# Allegro board DISPLAY.brd
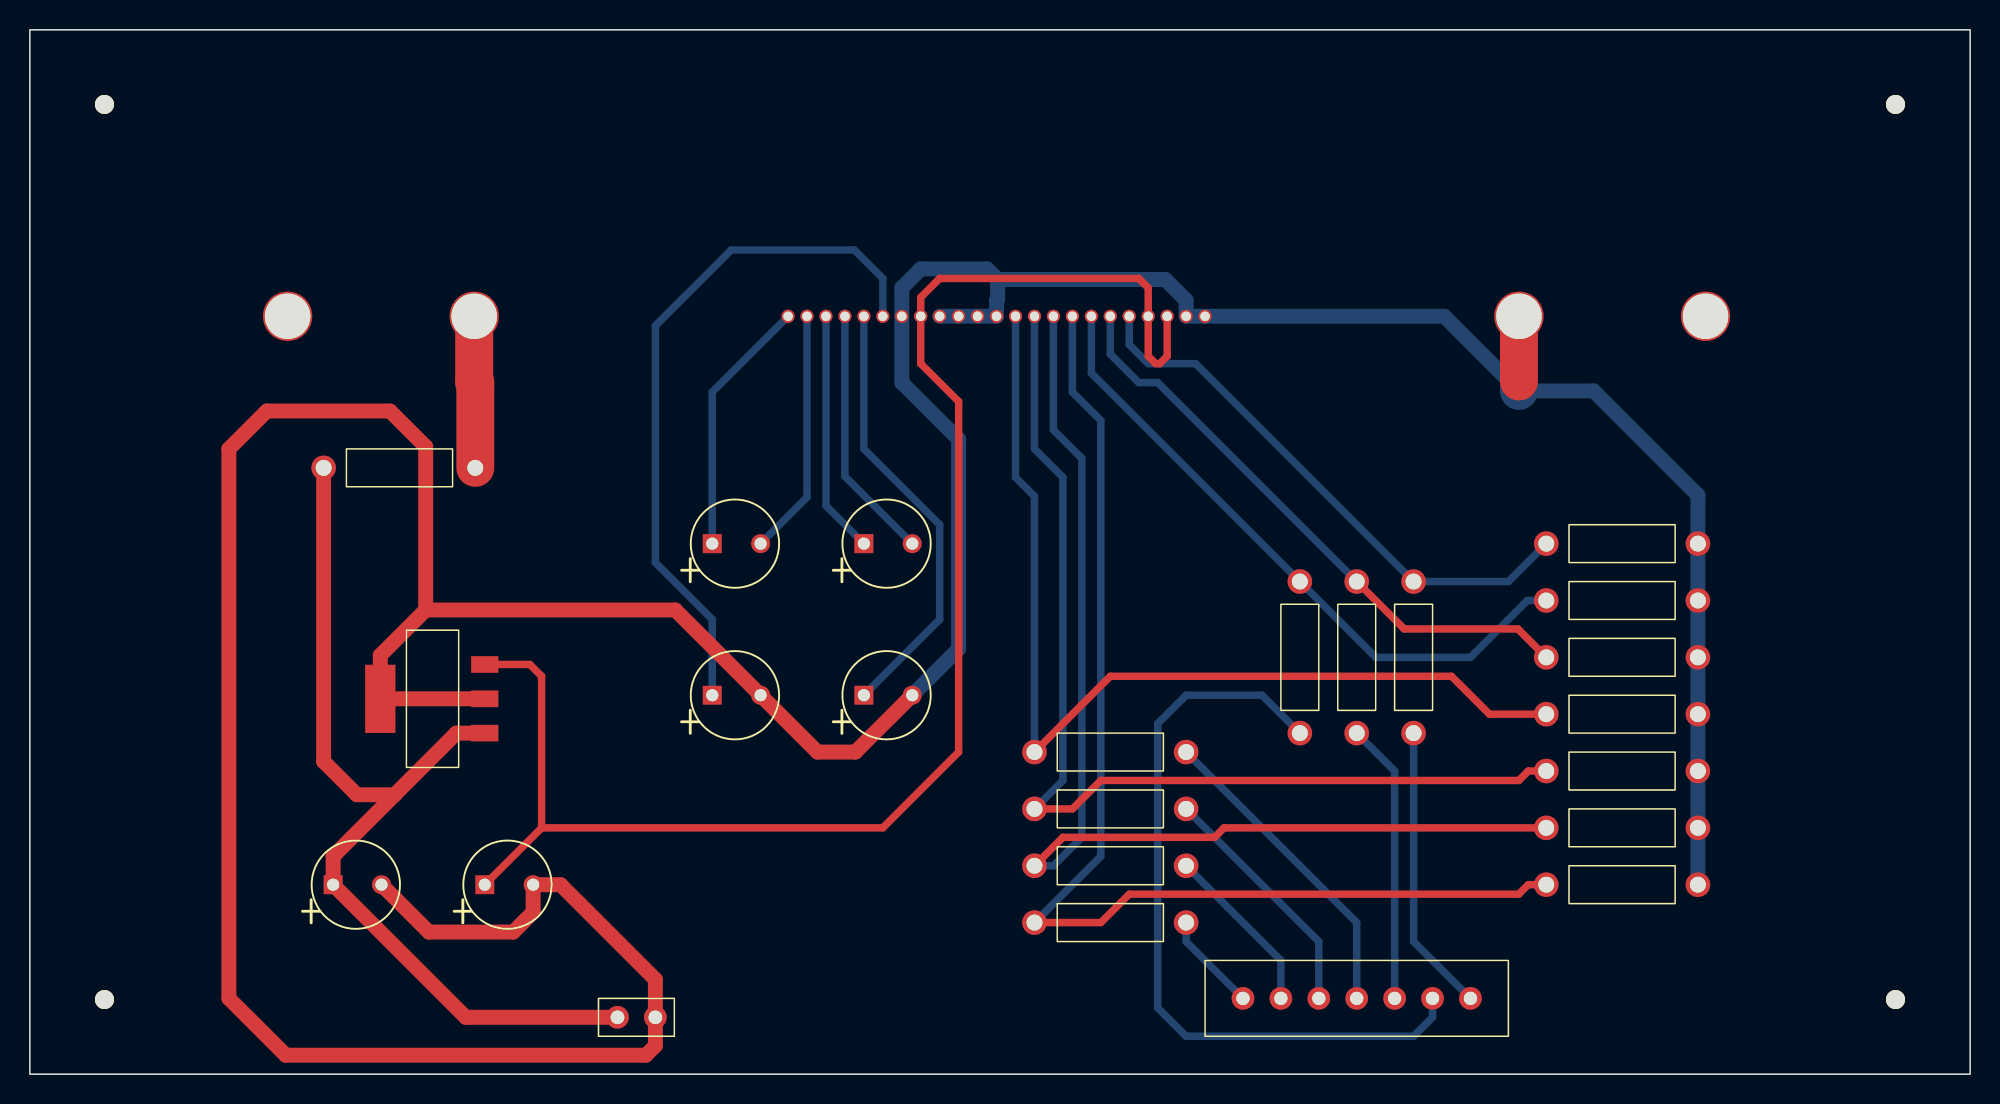
[diagram p0: board, top side]
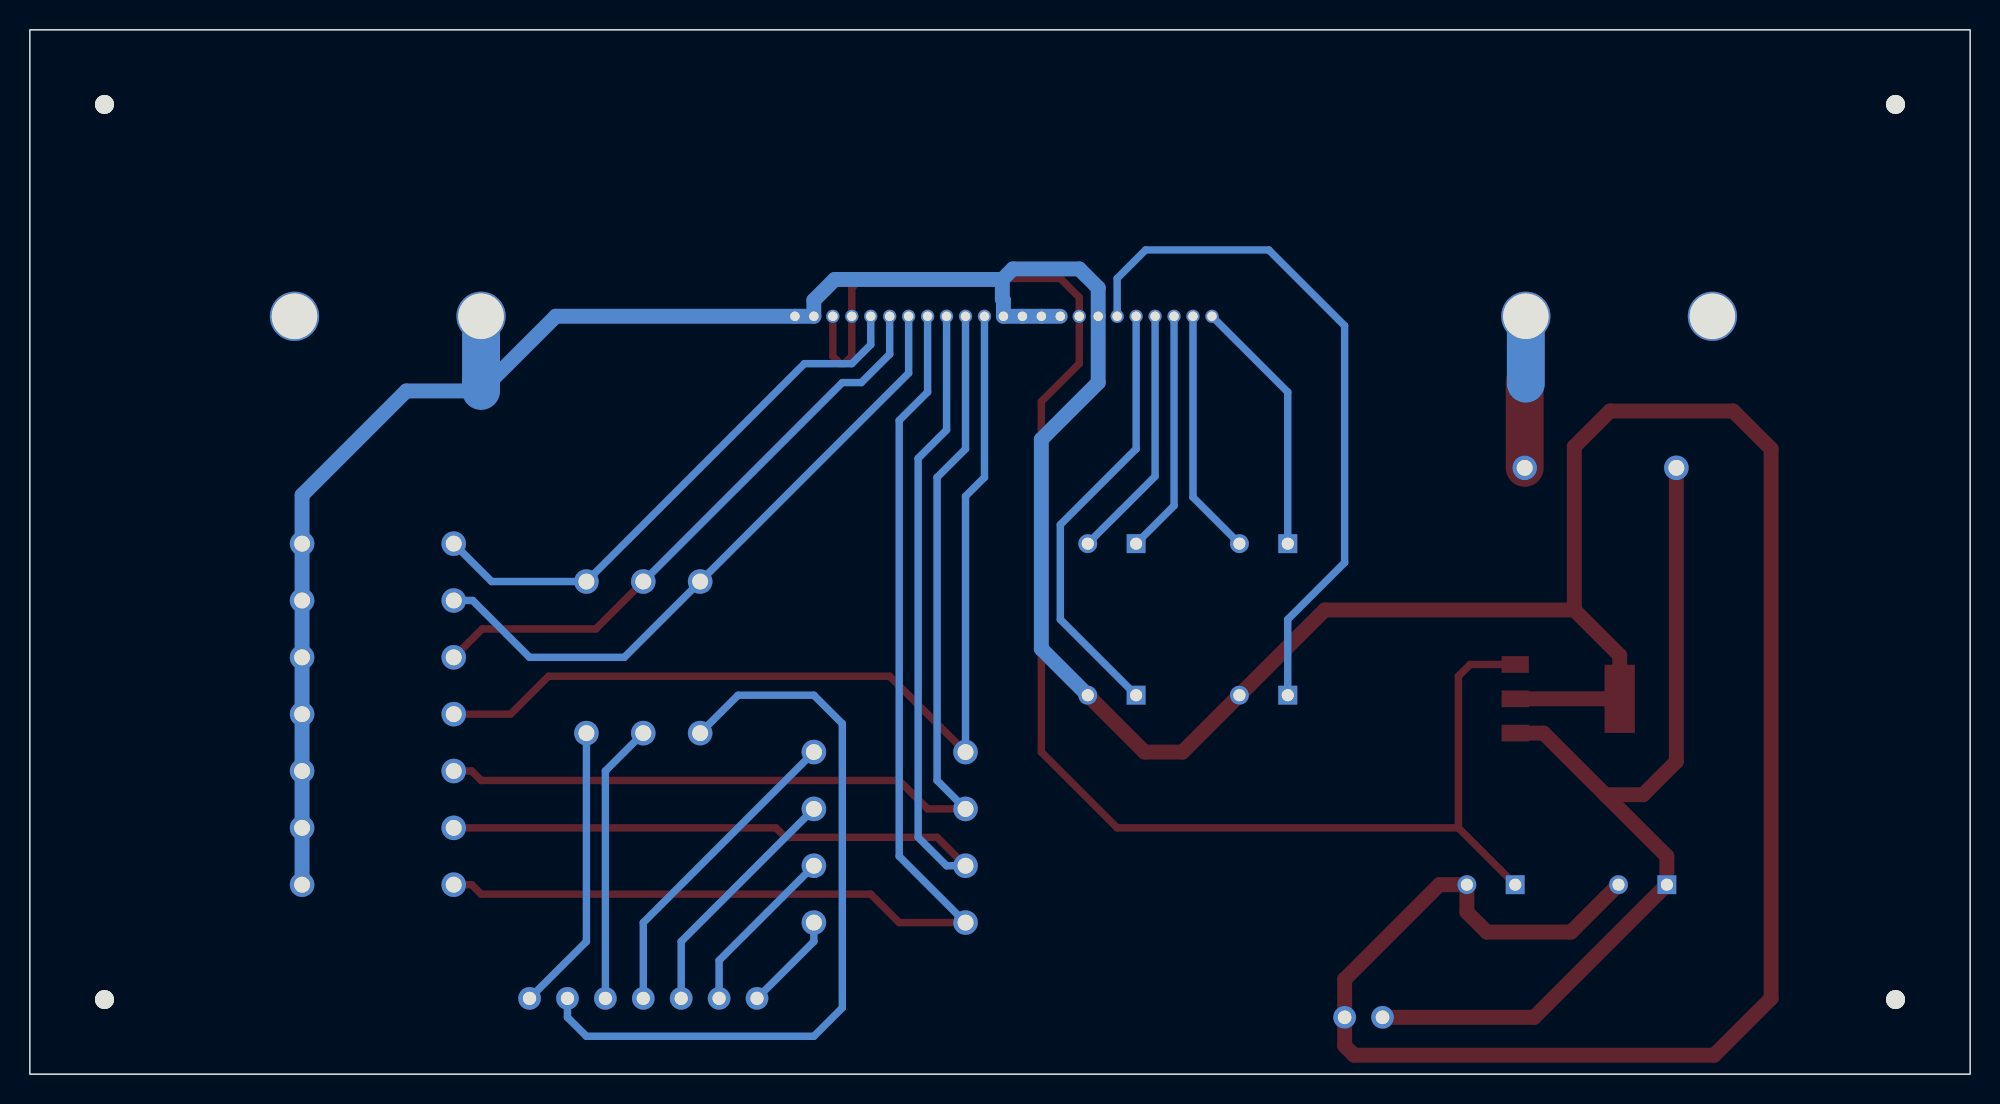
[diagram p1: board, bottom side, seen from below]

Outline 130 x 70 mm; copper layers: TOP, BOTTOM. Coordinates in mm from the lower left corner of the outline.
Outline path: rectangle 0,0 130,70

## Design rules (mm)
nets with their own width: min track width 1; nets GND VCC

## Placement (name value [footprint] x y rotation side)
C1  4.7uF/6.3V  [CAP_POL]  45.72 35.56 0 top
C2  4.7uF/6.3V  [CAP_POL]  55.88 35.56 0 top
C3  0.1uF/25V  [CAP_POL]  45.72 25.4 0 top
C4  0.1uF/25V  [CAP_POL]  55.88 25.4 0 top
C5  0.47uF  [CAP_POL]  20.32 12.7 0 top
C6  0.33uF  [CAP_POL]  30.48 12.7 0 top
J1  CON_POWER  [JUMPER2]  41.91 3.81 180 top
J2  CON_DATIN  [JUMPER7]  81.28 5.08 0 top
NOREF  -  [unnamed]  5 65 0 top
NOREF#2  -  [#2]  0 0 90 top
NOREF#3  -  [#2]  125 65 0 top
NOREF#4  -  [#2]  0 0 90 top
NOREF#5  -  [unnamed]  125 5 0 top
NOREF#6  -  [unnamed]  125 65 0 top
NOREF#7  -  [#2]  5 65 90 top
NOREF#8  -  [#2]  0 70 0 top
NOREF#9  -  [#2]  0 70 0 top
NOREF#10  -  [unnamed]  5 5 0 top
R1  R  [RES400]  19.68 40.64 270 top
R2  10k  [RES400]  67.31 10.16 270 top
R3  10k  [RES400]  67.31 17.78 270 top
R4  10k  [RES400]  67.31 21.59 270 top
R5  10k  [RES400]  67.31 13.97 270 top
R6  10k  [RES400]  88.9 33.02 180 top
R7  10k  [RES400]  85.09 33.02 180 top
R8  10k  [RES400]  92.71 33.02 180 top
R9  20k  [RES400]  101.6 35.56 270 top
R10  20k  [RES400]  101.6 31.75 270 top
R11  20k  [RES400]  101.6 27.94 270 top
R12  20k  [RES400]  101.6 24.13 270 top
R13  20k  [RES400]  101.6 20.32 270 top
R14  20k  [RES400]  101.6 16.51 270 top
R15  20k  [RES400]  101.6 12.7 270 top
U1  -  [GLCD_LG2401283]  50.8 50.8 0 top
U2  LM3940/TO220  [LM3940SOT223]  30.48 22.86 90 top

## Library data of the parts
C1-C6 = CAP
J1 = CON2: User Part Number: ***
J2 = CON7
R1-R15 = R: Tolerance: ***; User Part Number: ***
U1 = GLCD_LG2401283
U2 = LM3940/TO220_1

## Footprints (pads in the part's own frame, mm; a bottom-side part is the same pattern mirrored in y, then rotated)
CAP_POL
  rect 1.27x1.27 hole 0.813: 1(0,0)
  round 1.27 hole 0.813: 2(3.24,0)
GLCD_LG2401283
  round 3.302 hole 3.048: (-33.53,0) (61.47,0) 24(-21.03,0) 25(48.97,0)
  round 0.889 hole 0.635: 1(0,0) 2(1.27,0) 3(2.54,0) 4(3.81,0) 5(5.08,0) 6(6.35,0) 7(7.62,0) 8(8.89,0) 9(10.16,0) 10(11.43,0) 11(12.7,0) 12(13.97,0) 13(15.24,0) 14(16.51,0) 15(17.78,0) 16(19.05,0) 17(20.32,0) 18(21.59,0) 19(22.86,0) 20(24.13,0) 21(25.4,0) 22(26.67,0) 23(27.94,0)
JUMPER2
  round 1.524 hole 0.914: 1(0,0) 2(2.54,0)
JUMPER7
  round 1.524 hole 0.889: 1(0,0) 2(2.54,0) 3(5.08,0) 4(7.62,0) 5(10.16,0) 6(12.7,0) 7(15.24,0)
LM3940SOT223
  rect 1.118x1.829 smd: 1(0,0) 2(2.3,0) 3(4.6,0)
  rect 4.572x2.032 smd: 4(2.3,7)
RES400
  round 1.651 hole 1.067: 1(0,0) 2(0,10.16)
unnamed
  round 1.27 hole 3.962 unplated: (0,0)

## Nets
GND: C3.2 C4.2 C5.2 C6.2 J1.1 R9.2 R10.2 R11.2 R12.2 R13.2 R14.2 R15.2 U1.7(VSS) U1.9(D7) U1.10(D6) U1.11(D5) U1.12(D4) U1.22(BM0) U1.23(BM1) U1.25(K) U2.2 U2.4
VCC: C5.1 J1.2 R1.1 U2.1(IN)
VDD: C6.1 U1.8(VDD) U1.20(/RST) U1.21(CS) U2.3(OUT)
VB0+: C2.1 U1.3(VB0-)
VB0-: C2.2 U1.4(VB0+)
VB1+: C1.1 U1.1(VB1-)
VB1-: C1.2 U1.2(VB1+)
VBIAS: C3.1 U1.6(VBIAS)
VLCD: C4.1 U1.5(VLCD)
N23824: R1.2 U1.24(A)
N24272: R3.1 R13.1 U1.14(D2)
N24280: R2.1 R15.1 U1.16(D0)
N24284: R5.1 R14.1 U1.15(D1)
N24292: R8.1 R9.1 U1.19(CD)
N24296: R6.1 R11.1 U1.18(WR0)
N24300: R7.1 R10.1 U1.17(WR1)
N24664: R4.1 R12.1 U1.13(D3)
N26095: J2.1 R2.2
N26425: J2.3 R3.2
N26429: J2.2 R5.2
N26433: J2.4 R4.2
N26437: J2.5 R6.2
N26441: J2.6 R7.2
N26445: J2.7 R8.2

## Routing (per net, layer and track width the routed paths; a pad name or vN(x,y) marks a point on that pad's centre or on a via; arc(x,y) is an arc through that point)
GND: length 307.6
  TOP w1: 26.52,31.11 43.24,31.11 C3.2 52.77,21.59 55.31,21.59 C4.2 ; 26.52,31.11 23.48,28.07 U2.4 U2.2 ; 26.52,31.11 26.52,42.06 24.13,44.45 15.88,44.45 13.34,41.91 13.34,5.08 17.14,1.27 41.27,1.27 41.91,1.91 J1.1 41.91,6.35 35.56,12.7 C6.2 33.72,10.86 32.38,9.53 26.73,9.53 C5.2
  TOP w2.54: U1.25 99.77,46.43
  BOTTOM w1: 64.84,53.27 64.84,51.95 64.77,51.87 U1.12 U1.11 U1.10 U1.9 ; 64.84,53.27 64.14,53.98 59.69,53.98 58.42,52.7 U1.7 58.42,46.35 62.23,42.55 62.23,28.51 C4.2 ; 64.84,53.27 76.08,53.27 77.47,51.87 U1.22 U1.23 94.77,50.8 99.77,45.8 104.78,45.8 111.76,38.81 R9.2 R10.2 R11.2 R12.2 R13.2 R14.2 R15.2
  BOTTOM w2.54: U1.25 99.77,45.8
VCC: length 63.6
  TOP w1: 24.45,18.73 28.57,22.86 U2.1 ; 24.45,18.73 21.91,18.73 19.68,20.95 R1.1 ; 24.45,18.73 20.32,14.61 C5.1 29.21,3.81 J1.2
VDD: length 106.2
  TOP w0.5: U1.21 76.2,48.12 75.7,47.62 75.43,47.62 74.93,48.12 U1.20 74.93,52.7 74.3,53.34 60.96,53.34 59.69,52.07 U1.8 59.69,47.62 62.23,45.09 62.23,21.59 57.15,16.51 34.29,16.51 ; C6.1 34.29,16.51 ; 34.29,16.51 34.29,26.67 33.5,27.46 U2.3
VB0+: length 16.3
  BOTTOM w0.5: U1.3 53.34,38.1 C2.1
VB0-: length 17.1
  BOTTOM w0.5: C2.2 54.61,40.07 U1.4
VB1+: length 17.3
  BOTTOM w0.5: C1.1 45.72,45.72 U1.1
VB1-: length 16.5
  BOTTOM w0.5: C1.2 52.07,38.67 U1.2
VBIAS: length 47
  BOTTOM w0.5: C3.1 45.72,30.48 41.91,34.29 41.91,50.16 46.99,55.24 55.24,55.24 57.15,53.34 U1.6
VLCD: length 29.6
  BOTTOM w0.5: C4.1 60.96,30.48 60.96,36.83 55.88,41.91 U1.5
N23824: length 14.7
  TOP w2.54: R1.2 29.84,46.35 29.77,46.43 U1.24
  BOTTOM w2.54: U1.24 29.77,46.28
N24272: length 69.9
  TOP w0.5: R13.1 100.4,20.32 99.76,19.68 71.75,19.68 69.85,17.78 R3.1
  BOTTOM w0.5: R3.1 69.22,19.68 69.22,40.01 67.31,41.91 U1.14
N24280: length 78.6
  TOP w0.5: R15.1 100.4,12.7 99.76,12.06 73.66,12.06 71.75,10.16 R2.1
  BOTTOM w0.5: R2.1 71.75,14.61 71.75,43.81 69.85,45.72 U1.16
N24284: length 75
  TOP w0.5: R5.1 69.22,15.88 79.38,15.88 80.01,16.51 R14.1
  BOTTOM w0.5: R5.1 68.58,13.97 70.48,15.88 70.48,41.27 68.58,43.18 U1.15
N24292: length 37.5
  BOTTOM w0.5: U1.19 73.66,48.9 74.93,47.62 78.11,47.62 R8.1 99.06,33.02 R9.1
N24296: length 40.2
  TOP w0.5: R6.1 92.08,29.84 99.69,29.84 R11.1
  BOTTOM w0.5: U1.18 72.39,48.26 74.3,46.35 75.56,46.35 R6.1
N24300: length 43.8
  BOTTOM w0.5: U1.17 71.12,46.99 R7.1 90.17,27.94 96.52,27.94 100.33,31.75 R10.1
N24664: length 67.2
  TOP w0.5: R4.1 72.39,26.67 95.25,26.67 97.79,24.13 R12.1
  BOTTOM w0.5: R4.1 67.31,38.73 66.04,40.01 U1.13
N26095: length 6.7
  BOTTOM w0.5: J2.1 77.47,8.89 R2.2
N26425: length 16.4
  BOTTOM w0.5: R3.2 86.36,8.89 J2.3
N26429: length 11.5
  BOTTOM w0.5: J2.2 83.82,7.62 R5.2
N26433: length 21.2
  BOTTOM w0.5: J2.4 88.9,10.16 R4.2
N26437: length 18.8
  BOTTOM w0.5: J2.5 91.44,20.32 R6.2
N26441: length 51.4
  BOTTOM w0.5: J2.6 93.98,3.81 92.71,2.54 77.47,2.54 75.56,4.45 75.56,23.5 77.47,25.4 82.55,25.4 R7.2
N26445: length 19.4
  BOTTOM w0.5: J2.7 92.71,8.89 R8.2

## Text on the board
DIMENSION: FIGURE | SIZE | 0.635 | 0.813 | 0.889 | 0.914 | 1.067 | 3.048 | 3.962 | DRILL CHART: TOP to BOTTOM | ALL UNITS ARE IN MILLIMETERS | PLATED | NON-PLATED | QTY | 23 | 12 | 7 | 2 | 30 | 4
